# Altium PCB Carte_Nucleo.PcbDoc
Units mm, origin at the board's own origin, x right, y up, seen from the top; angles counter-clockwise.
Board outline 175 x 85 mm, 4 copper layers (Top Layer, +3V3, GND, Bottom Layer), stack 0.603 mm thick; 66 components, 70 nets, 338 pads, 91 vias.
Unrouted connection lines stored in the file: 84.
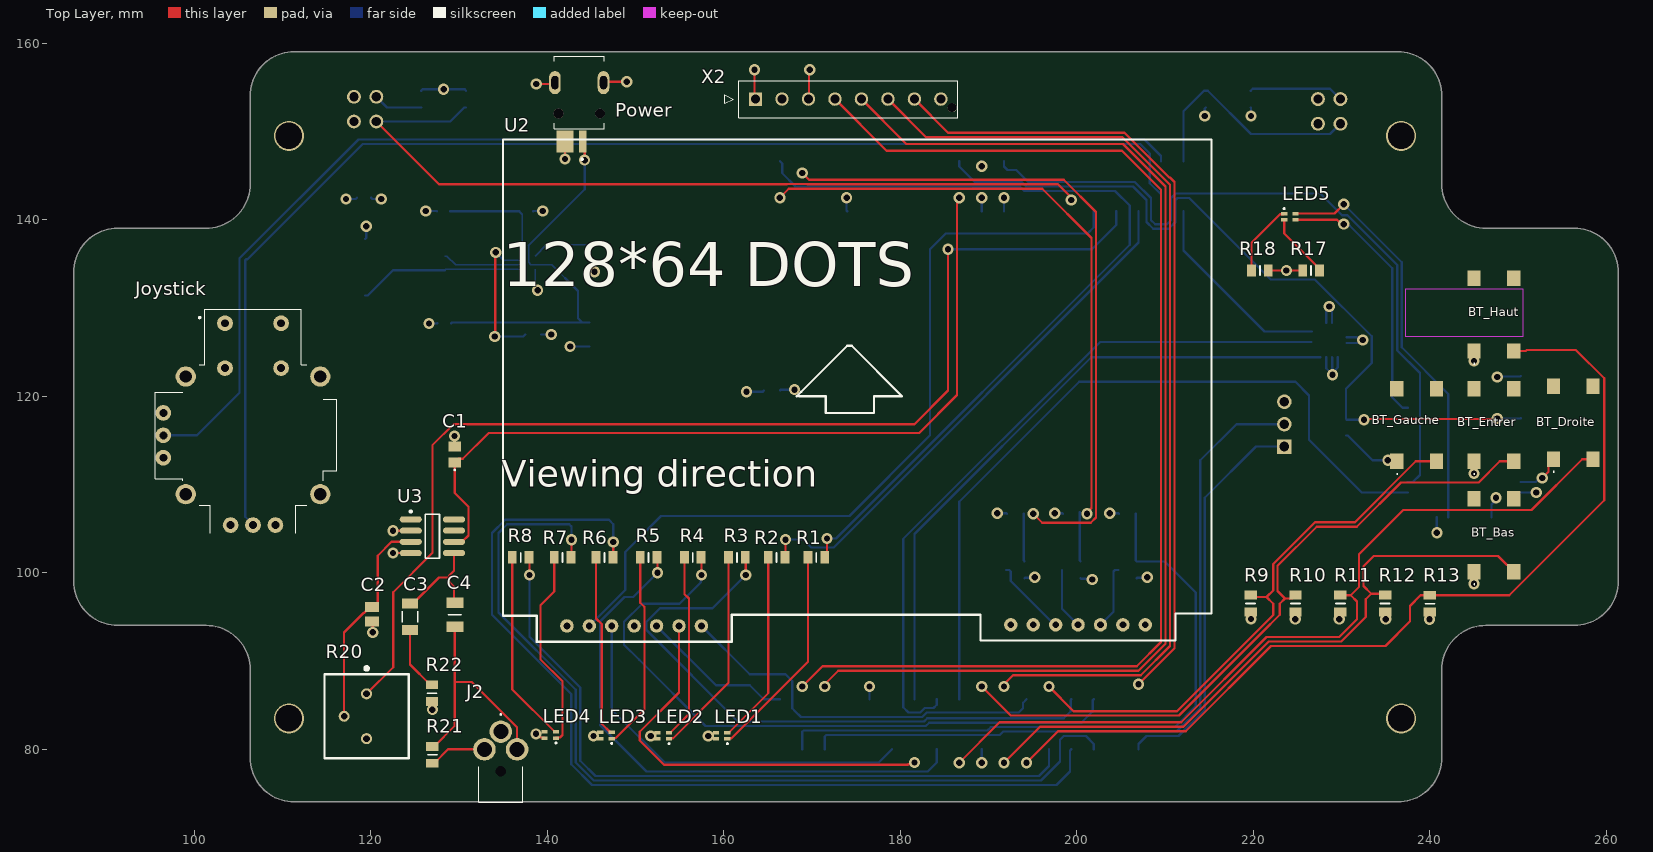
[diagram p0: Top Layer view]
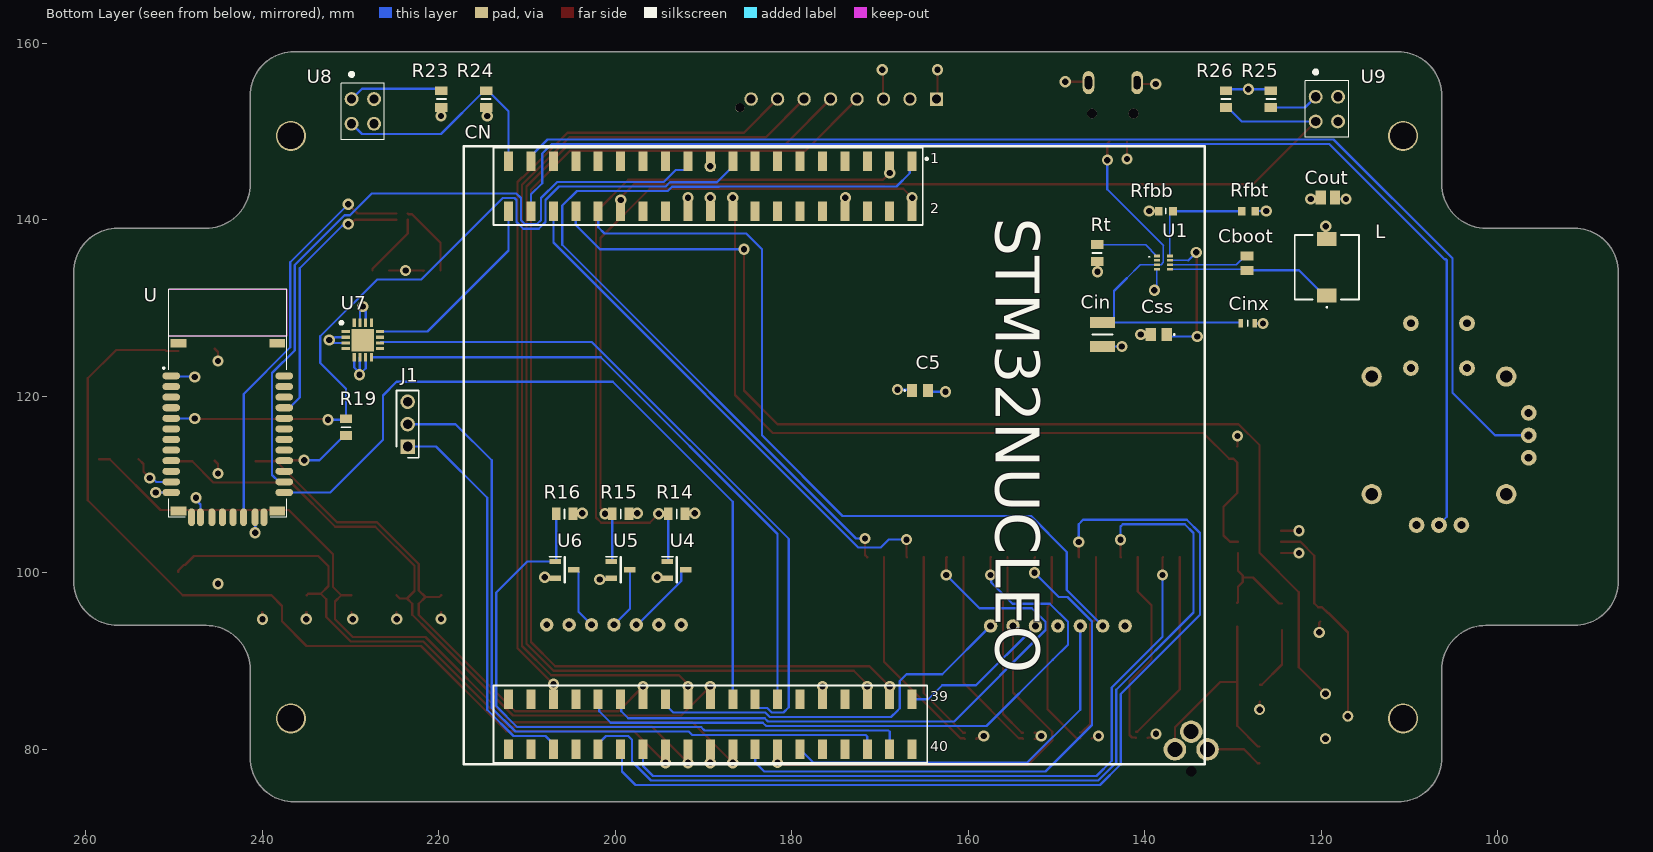
[diagram p1: Bottom Layer view, seen from below]
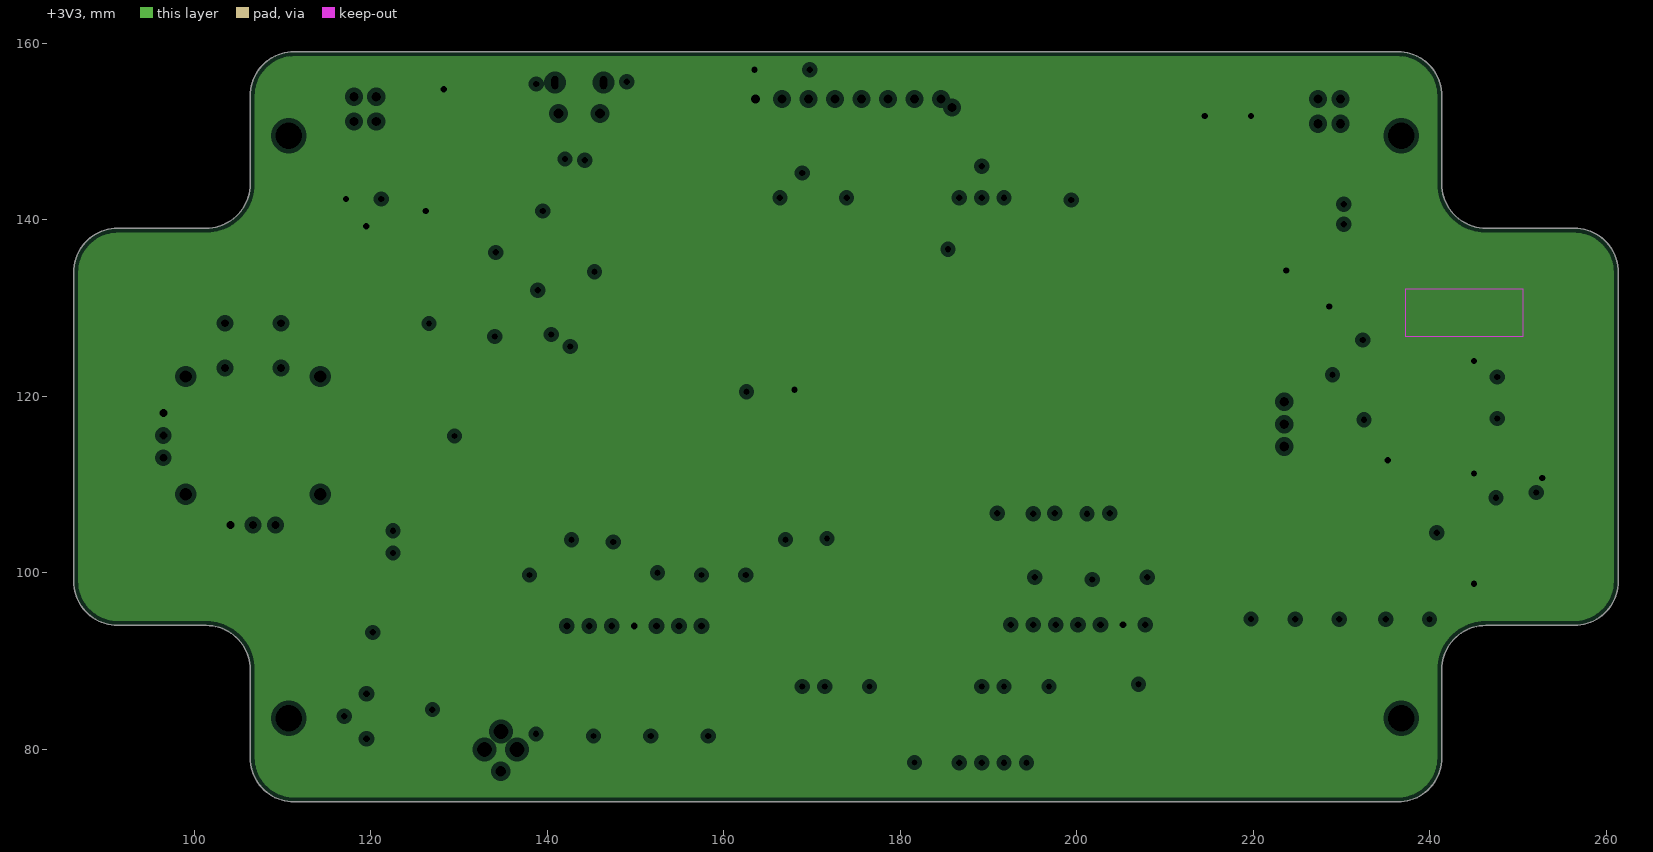
[diagram p2: +3V3, clearances drawn from the general rule]
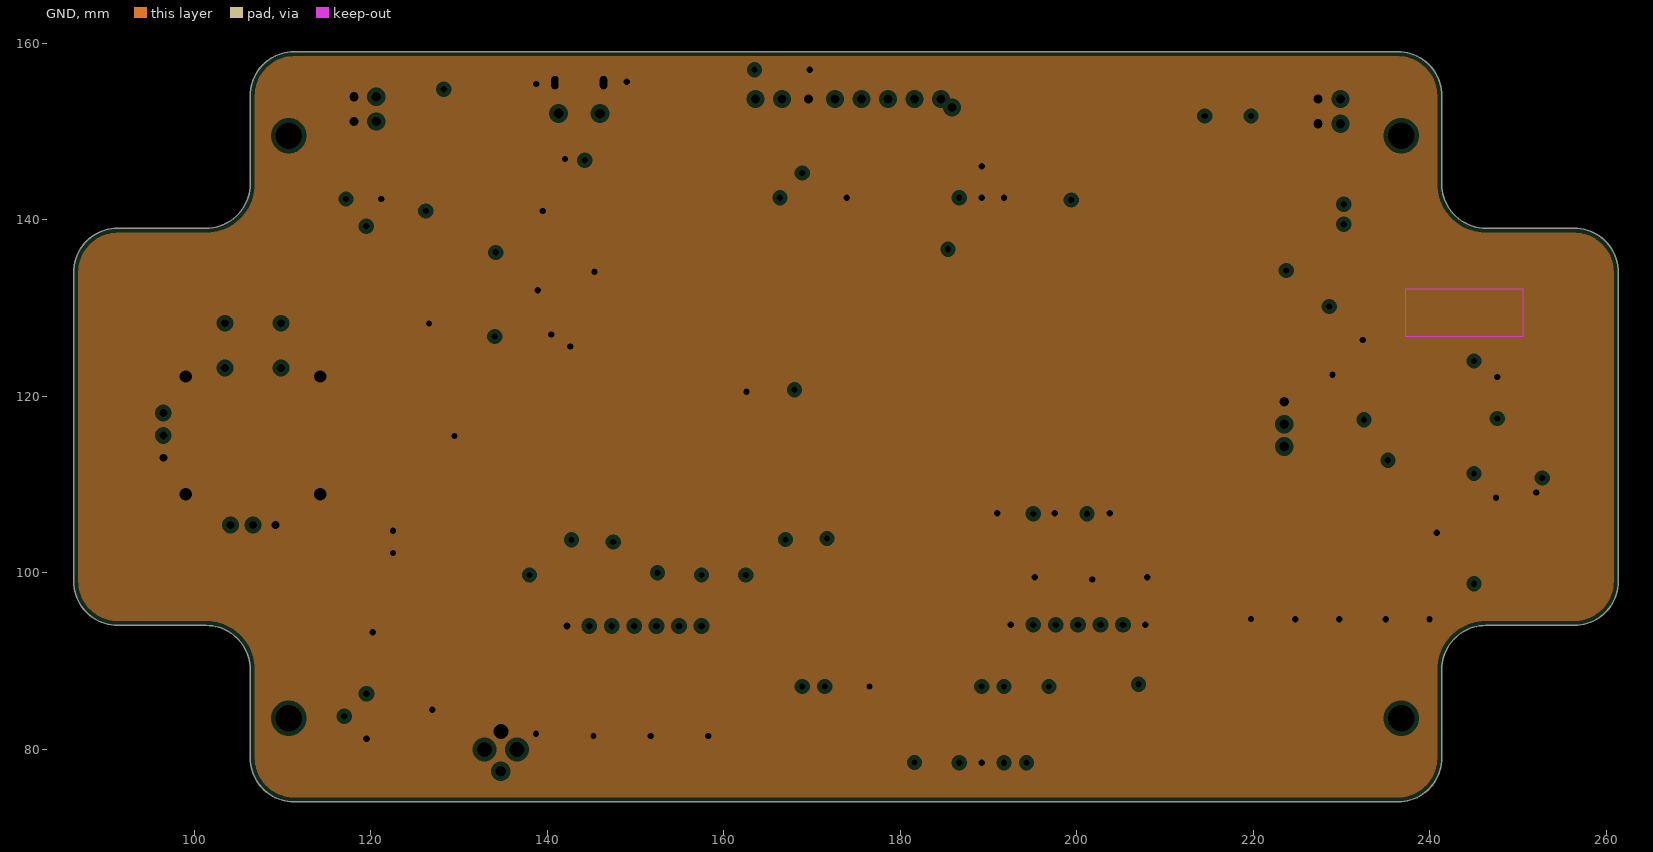
[diagram p3: GND, clearances drawn from the general rule]

## Layer stack, top to bottom
Top Solder: solder mask 0.0102, Solder Resist, Dk 3.5
Top Layer: signal copper 0.0356
Dielectric 2: prepreg 0.0711, PP-006, Dk 4.1
+3V3: plane copper 0.035, net +3V3
Dielectric 1: dielectric 0.32, FR-4, Dk 4.8
GND: plane copper 0.035, net GND
Dielectric 3: prepreg 0.0711, PP-006, Dk 4.1
Bottom Layer: signal copper 0.0356
Bottom Solder: solder mask 0.0102, Solder Resist, Dk 3.5

## Board outline
106.36,79.041 106.36,89.041 ccw(c101.36,89.041) 101.36,94.041 91.36,94.041 cw(c91.36,99.041) 86.36,99.041 86.36,134.041 cw(c91.36,134.041) 91.36,139.041 101.36,139.041 ccw(c101.36,144.041) 106.36,144.041 106.36,154.041 cw(c111.36,154.041) 111.36,159.041 236.36,159.041 cw(c236.36,154.041) 241.36,154.041 241.36,144.041 ccw(c246.36,144.041) 246.36,139.041 256.36,139.041 cw(c256.36,134.041) 261.36,134.041 261.36,99.041 cw(c256.36,99.041) 256.36,94.041 246.36,94.041 ccw(c246.36,89.041) 241.36,89.041 241.36,79.041 cw(c236.36,79.041) 236.36,74.041 111.36,74.041 cw(c111.36,79.041)

## Design rules (kind name [scope] priority, off if disabled: settings)
Clearance [All] p1: gap=0.254 ignorepadtopadclearanceinfootprint=TRUE except(0: Arc-Hole Track-Hole SMDPad-Hole THPad-Hole Via-Hole Fill-Hole Poly-Hole Region-Hole Text-Hole)
ComponentClearance [All] p1: gap=0.254 collisioncheckmode=3 verticalgap=0.254 showdistances=FALSE donotcheckwithout3dbody=TRUE
HoleSize [All] p1: absolutevalues=TRUE maxlimit=3 minlimit=0.025 maxpercent=80.000 minpercent=20.000
PlaneClearance [All] p1: clearance=0.508
PlaneConnect [All] p1: pad.planeconnectstyle=Relief pad.reliefexpansion=0.508 pad.reliefentries=4 pad.reliefconductorwidth=0.254 pad.reliefairgap=0.254 via.planeconnectstyle=Direct via.reliefexpansion=0.508 via.reliefentries=4 via.reliefconductorwidth=0.254 via.reliefairgap=0.254
PolygonConnect [All] p1: connectstyle=Relief reliefconductorwidth=0.254 reliefentries=4 polygonreliefangle="90 Angle" airgapwidth=0.254
RoomDefinition Alimentation [InComponentClass('Alimentation')] p1: confinementstyle=ConfineIn formatcopy=TRUE lockcomponents=FALSE outline 262.509,75.565 340.106,75.565 340.106,94.361 262.509,94.361
RoomDefinition Connecteur_Nucleo [InComponentClass('Connecteur_Nucleo')] p2: confinementstyle=ConfineIn formatcopy=TRUE lockcomponents=FALSE outline 262.509,95.631 337.439,95.631 337.439,182.753 262.509,182.753
RoomDefinition IO_Carte_Nucleo [InComponentClass('IO_Carte_Nucleo')] p3: confinementstyle=ConfineIn formatcopy=TRUE lockcomponents=FALSE outline 262.509,184.023 534.924,184.023 534.924,267.462 262.509,267.462
RoomDefinition IO_Carte_Nucleo2 [InComponentClass('IO_Carte_Nucleo2')] p4: confinementstyle=ConfineIn formatcopy=TRUE lockcomponents=FALSE outline 262.509,268.605 430.657,268.605 430.657,299.339 262.509,299.339
RoutingVias [All] p1: holewidth=0.711 width=1.27 viastyle="Through Hole" minholewidth=0.711 minwidth=1.27 maxholewidth=0.711 maxwidth=1.27
SolderMaskExpansion [All] p1: expansion=0.102 istentingtop=FALSE
Width [All] p1: maxlimit=0.254 minlimit=0.15 preferedwidth=0.254
26 further rules are at their usual default settings.

## Classes and differential pairs
component class IO_Carte_Nucleo: BT_Bas BT_Droite BT_Entrer BT_Gauche BT_Haut Joystick LED1 LED2 LED3 LED4 R1 R2 R3 R4 R5 R6 R7 R8 R9 R10 R11 R12 R13 R14 R15 R16 U2 U4 U5 U6
component class IO_Carte_Nucleo2: C1 C2 C3 C4 C5 J2 LED5 R17 R18 R19 R20 R21 R22 R23 R24 R25 R26 U U3 U7 U8 U9 X2
component class Connecteur_Nucleo: CN J1
component class Alimentation: Cboot Cin Cinx Cout Css L Power Rfbb Rfbt Rt U1

## Components (designator, comment, footprint, x,y, rotation, side; value= is the part's Value field where it differs from the comment)
BT_Bas "TS05-66-50-BK-260-SMT-67" TS056650BK260SMT67 247.25,104.25 r90 top locked
BT_Droite "TS05-66-50-BK-260-SMT-67" TS056650BK260SMT67 256.25,117 r90 top locked
BT_Entrer "TS05-66-50-BK-260-SMT-67" TS056650BK260SMT67 247.25,116.75 r90 top locked
BT_Gauche "TS05-66-50-BK-260-SMT-67" TS056650BK260SMT67 238.5,116.75 r90 top locked
BT_Haut "TS05-66-50-BK-260-SMT-67" TS056650BK260SMT67 247.25,129.25 r90 top locked
C1 "C0805X474K3RACAUTO7210" C0805 129.54,113.4 r90 top
C2 "C0805X105K5RACAUTO" CAPC2012X145N 120.142,95.298 r270 top
C3 "12065C503JAT2A" CAPC3216X94N 124.46,95.021 r270 top
C4 "GRM31CR60J227ME11L" CAPC3216X190N 129.54,95.25 r270 top
C5 "C0805X474K3RACAUTO7210" C0805 165.47,120.65 r180 bottom
Cboot "C0805C104K5RAC7411" CAPC2012X88N 128.425,135.075 r270 bottom
Cin "UMR325AC7106MM-P" CAPC3225X280N 144.78,127 r270 bottom
Cinx "CGA3E2X7R1H104K080AA" CAPC1608X90N 128.35,128.275 r180 bottom
CN "" "Nucleo-conn-SMD - sans 3D" 189.23,113.316 r270 bottom locked
Cout "GRM21BR60G107ME15L" CAPC2012X145N 119.265,142.5 r180 bottom
Css "C0805C333J2RACTU" C0805 138.43,127 r0 bottom
J1 "XJ8B-0311" HDRV3W64P0X254_1X3_760X250X580P 223.52,114.3 r90 bottom
J2 "MJ1-2503A" MJ12503A 134.75,82 r90 top
Joystick "COM-09032" XDCR_COM-09032 106.553,115.824 r0 top locked
L "74477710" 74477710 119.38,134.62 r0 bottom
LED1 "HSMF-C165" HSMF-C163 159.766,81.534 r180 top
LED2 "HSMF-C165" HSMF-C163 153.162,81.534 r180 top
LED3 "HSMF-C165" HSMF-C163 146.67,81.565 r180 top
LED4 "HSMF-C165" HSMF-C163 140.35,81.63 r180 top
LED5 "HSMF-C165" HSMF-C163 224.15,140.35 r0 top
Power "PJ-072C-SMT-TR" PJ-072C-SMT-TR 143.51,154.94 r270 top
R1 "CR0805-FX-1200ELF" RESC2012X60N 170.5,101.75 r180 top
R2 "CR0805-FX-1200ELF" RESC2012X60N 166,101.75 r180 top
R3 "CR0805-FX-1200ELF" RESC2012X60N 161.5,101.75 r180 top
R4 "CR0805-FX-1200ELF" RESC2012X60N 156.5,101.75 r180 top
R5 "CR0805-FX-1200ELF" RESC2012X60N 151.5,101.75 r180 top
R6 "CR0805-FX-1200ELF" RESC2012X60N 146.5,101.75 r180 top
R7 "CR0805-FX-1200ELF" RESC2012X60N 141.75,101.75 r180 top
R8 "CR0805-FX-1200ELF" RESC2012X60N 137,101.75 r180 top
R9 "CR0805-JW-103ELF" RESC2012X60N 219.71,96.52 r270 top
R10 "CR0805-JW-103ELF" RESC2012X60N 224.79,96.52 r270 top
R11 "CR0805-JW-103ELF" RESC2012X60N 229.87,96.52 r270 top
R12 "CR0805-JW-103ELF" RESC2012X60N 234.95,96.52 r270 top
R13 "CR0805-JW-103ELF" RESC2012X60N 240,96.5 r270 top
R14 "CR0805-JW-103ELF" RESC2012X60N 193.04,106.68 r180 bottom
R15 "CR0805-JW-103ELF" RESC2012X60N 199.39,106.68 r180 bottom
R16 "CR0805-JW-103ELF" RESC2012X60N 205.74,106.68 r180 bottom
R17 "CR0805-FX-1200ELF" RESC2012X60N 226.55,134.25 r180 top
R18 "CR0805-FX-1200ELF" RESC2012X60N 220.75,134.25 r0 top (schematic designator R18$)
R19 "CR0805-JW-103ELF" RESC2012X60N 230.5,116.5 r90 bottom
R20 "3386P-1-103LF" 3386P_1 124.32,78.985 r90 top
R21 "CRCW08050000Z0EAC" RESC2012X60N 127,79.375 r270 top
R22 "CHP0805AFX-10R0ELF" RESC2012X60N 126.96,86.36 r270 top
R23 "CR0805-FX-1000ELF" RESC2012X60N 219.71,153.67 r90 bottom
R24 "CR0805-JW-103ELF" RESC2012X60N 214.63,153.67 r90 bottom
R25 "CR0805-FX-1000ELF" RESC2012X60N 125.73,153.67 r270 bottom
R26 "CR0805-JW-103ELF" RESC2012X60N 130.81,153.67 r270 bottom
Rfbb "CRCW060310K0FKEAC" RESC1608X55N 137.63,140.97 r0 bottom
Rfbt "CRCW060330K9FKEA" RESC1608X50N 128.27,140.97 r0 bottom
Rt "CR0805-FX-6192ELF" RESC2012X60N 145.4,136.225 r270 bottom
U "RN42-I/RM" XCVR_RN42-I/RM 243.9,115.7 r180 bottom locked
U1 "TPS62932DRLR" TPS62932DRLR 137.9,135.14 r180 bottom
U2 "NHD-C12864A1Z-FS(RGB)-FBW-HT1" NHD-C12864A1Z-FS(RGB)-FBW-HT1 145.034,94.234 r0 top locked
U3 "LM386M-1/NOPB" TI-D8_M 127,104.14 r0 top
U4 "IRLML6344TRPBF" SOT95P237X112-3N 193.04,100.33 r180 bottom
U5 "IRLML6344TRPBF" SOT95P237X112-3N 199.39,100.33 r180 bottom
U6 "IRLML6344TRPBF" SOT95P237X112-3N 205.74,100.33 r180 bottom
U7 "ADXL335BCPZ-RL7" QFN65P400X400X150-17N-D 228.6,126.365 r180 bottom
U8 "ITR-20001_T" ITR20001T 229.87,153.67 r270 bottom
U9 "ITR-20001_T" ITR20001T 120.65,153.93 r270 bottom
X2 "216571-2008" 216571-YY08 163.61,153.67 r180 top locked

## Footprints (in the part's own frame and the unit in brackets; to place one, negate y for a bottom-side part, rotate by r counter-clockwise, add the part's x,y. Pads: shape width x height; smd on the part's side, far side on the other; paste and mask are expansions set on the pad)
3386P_1 [mm]
  round 1.25 hole 0.75: 1(7.305,4.78) 2(4.765,7.32) 3(2.225,4.78)
  silkscreen extent 0,0 10.36,9.53
216571-YY08 [mm]
  rect 1.52x1.52 hole 1.02: 1(0,0)
  round 1.52 hole 1.02: 2(-3,0) 3(-6,0) 4(-9,0) 5(-12,0) 6(-15,0) 7(-18,0) 8(-21,0)
  round 1.02 hole 1.02 unplated: 9(-22.28,0.98)
  silkscreen extent -22.93,-2.09 3.5,2.09, body extent -22.93,-2.09 3.25,2.09, height 10.01
74477710 [mm]
  rect 2.2x1.6 smd: 1(0,3.2) 2(0,-3.2)
  silkscreen extent -3.65,-3.65 3.65,4.6, body extent -3.65,-3.84 3.65,3.84, height 4.6
C0805 [mm]
  rect 1.15x1.45 smd: 1(-0.9,0) 2(0.9,0)
  silkscreen extent -1.8,-0.05 -1.7,0.05, body extent -1.15,-0.78 1.15,0.77, height 0.98
CAPC1608X90N [mm]
  rect 0.54x0.94 smd: 1(-0.8,0) 2(0.8,0)
  silkscreen extent 0,-0.3 0,0.3, body extent -0.8,-0.4 0.8,0.4, height 0.9
CAPC2012X88N [mm]
  rect 1.02x1.47 smd: 1(-0.8,0) 2(0.8,0)
  body extent -1,-0.63 1,0.63, height 0.88
CAPC2012X145N [mm]
  rect 1.14x1.57 smd: 1(-0.81,0) 2(0.81,0)
  body extent -1.17,-0.78 1.18,0.77, height 1.45
CAPC3216X94N [mil]
  rect 44x71 smd: 1(-59,0) 2(59,0)
  silkscreen extent -24,-35 24,35
CAPC3216X190N [mm]
  rect 1.22x1.92 smd: 1(-1.35,0) 2(1.35,0)
  silkscreen extent 0,-0.7 0,0.7, body extent -1.6,-0.8 1.6,0.8, height 1.9
CAPC3225X280N [mm]
  rect 1.22x2.82 smd: 1(-1.35,0) 2(1.35,0)
  silkscreen extent 0,-1.15 0,1.15, body extent -1.6,-1.25 1.6,1.25, height 2.8
HDRV3W64P0X254_1X3_760X250X580P [mm]
  rect 1.65x1.65 hole 1.1: 1(0,0)
  round 1.65 hole 1.1: 2(2.54,0) 3(5.08,0)
  silkscreen extent -1.26,-1.25 6.34,1.25, body extent -1.26,-1.25 6.34,1.25, height 5.8
HSMF-C163 [mm]
  rect 0.7x0.4 smd: 1(-0.65,0.35) 2(-0.65,-0.35) 3(0.65,0.35) 4(0.65,-0.35)
  silkscreen extent -0.72,0.83 -0.58,0.97
ITR20001T [mm]
  round 1.575 hole 1.05: 1(0,0) 2(0,2.54) 3(2.8,2.54) 4(2.8,0)
  silkscreen extent -3,-1.18 4.6,3.72, body extent -1.8,-1.18 4.6,3.72, height 6.9
MJ12503A [mm]
  round 2.55 hole 1.7: 1(0,0) 2(-2,-1.85) 3(-2,1.85)
  round 0.6 hole 1.2 unplated: MH1(-4.5,0)
  silkscreen extent -8,-2.5 2,2.5, body extent -11,-2.6 0.75,2.6, height 5.1
NHD-C12864A1Z-FS(RGB)-FBW-HT1 [mil]
  round 60 hole 30: 1(-110,-10) 2(-10,-10) 3(90,-10) 4(190,-10) 5(290,-10) 6(390,-10) 7(490,-10) 8(1870,-5) 9(1970,-5) 10(2070,-5) 11(2170,-5) 12(2270,-5) 13(2370,-5) 14(2470,-5)
  silkscreen extent -395,-80 2765,2160
"Nucleo-conn-SMD - sans 3D" [mm] "Interface Nucleo morpho connectors"
  rect 2.22x1.02 smd: 1(-33.306,22.86) 2(-27.654,22.86) 3(-33.306,20.32) 4(-27.654,20.32) 5(-33.306,17.78) 6(-27.654,17.78) 7(-33.306,15.24) 8(-27.654,15.24) 9(-33.306,12.7) 10(-27.654,12.7) 11(-33.306,10.16) 12(-27.654,10.16) 13(-33.306,7.62) 14(-27.654,7.62) 15(-33.306,5.08) 16(-27.654,5.08) 17(-33.306,2.54) 18(-27.654,2.54) 19(-33.306,0) 20(-27.654,0) 21(-33.306,-2.54) 22(-27.654,-2.54) 23(-33.306,-5.08) 24(-27.654,-5.08) 25(-33.306,-7.62) 26(-27.654,-7.62) 27(-33.306,-10.16) 28(-27.654,-10.16) 29(-33.306,-12.7) 30(-27.654,-12.7) 31(-33.306,-15.24) 32(-27.654,-15.24) 33(-33.306,-17.78) 34(-27.654,-17.78) 35(-33.306,-20.32) 36(-27.654,-20.32) 37(-33.306,-22.86) 38(-27.654,-22.86) 39(27.654,22.86) 39(27.654,22.86) 40(33.306,22.86) 41(27.654,20.32) 42(33.306,20.32) 43(27.654,17.78) 44(33.306,17.78) 45(27.654,15.24) 46(33.306,15.24) 47(27.654,12.7) 48(33.306,12.7) 49(27.654,10.16) 50(33.306,10.16) 51(27.654,7.62) 52(33.306,7.62) 53(27.654,5.08) 54(33.306,5.08) 55(27.654,2.54) 56(33.306,2.54) 57(27.654,0) 58(33.306,0) 59(27.654,-2.54) 60(33.306,-2.54) 61(27.654,-5.08) 62(33.306,-5.08) 63(27.654,-7.62) 64(33.306,-7.62) 65(27.654,-10.16) 66(33.306,-10.16) 67(27.654,-12.7) 68(33.306,-12.7) 69(27.654,-15.24) 70(33.306,-15.24) 71(27.654,-17.78) 72(33.306,-17.78) 73(27.654,-20.32) 74(33.306,-20.32) 75(27.654,-22.86) 76(33.306,-22.86)
  silkscreen extent -35,-27.94 35,56.03, body extent -34.02,-24.16 33.97,24.1, height 7.37
PJ-072C-SMT-TR [mm]
  rect 2.45x0.9 smd: 1(6.083,0.527)
  rect 2.45x1.9 smd: 2(6.083,-1.473)
  oval 2.616x1.308 hole 0.8 slot 1.5 at 0 deg: 3(-0.592,2.877) 4(-0.592,-2.623)
  round 1.1 hole 1.1 unplated: ""(2.908,2.477) ""(2.908,-2.223)
  silkscreen extent -3.59,-2.72 8.18,2.98
QFN65P400X400X150-17N-D [mm]
  rect 0.95x0.35 smd: 1(-1.95,0.975) 2(-1.95,0.325) 3(-1.95,-0.325) 4(-1.95,-0.975) 9(1.95,-0.975) 10(1.95,-0.325) 11(1.95,0.325) 12(1.95,0.975)
  rect 0.35x0.95 smd: 5(-0.975,-1.95) 6(-0.325,-1.95) 7(0.325,-1.95) 8(0.975,-1.95) 13(0.975,1.95) 14(0.325,1.95) 15(-0.325,1.95) 16(-0.975,1.95)
  rect 2.55x2.55 smd: 17(0,0)
  silkscreen extent -2.59,1.79 -2.26,2.11, body extent -2.05,-2.05 2.05,2.05, height 1.5
RESC1608X50N [mm]
  rect 0.85x1 smd: 1(-0.75,0) 2(0.75,0)
  body extent -0.79,-0.43 0.79,0.43, height 0.5
RESC1608X55N [mm]
  rect 0.9x0.95 smd: 1(-0.8,0) 2(0.8,0)
  silkscreen extent 0,-0.3 0,0.3, body extent -0.8,-0.4 0.8,0.4, height 0.55
RESC2012X60N [mm]
  rect 1x1.4 smd: 1(-0.95,0) 2(0.95,0)
  silkscreen extent 0,-0.53 0,0.53, body extent -1,-0.63 1,0.63, height 0.5
SOT95P237X112-3N [mm]
  rect 1.3x0.6 smd: 1(-1.05,0.95) 2(-1.05,-0.95) 3(1.05,0)
  silkscreen extent -1.7,-1.46 0.05,1.5, body extent -1.18,-1.46 1.18,1.46, height 1.12
TI-D8_M [mm] "SOIC, 8-Leads, Body 5x4mm, Pitch 1.27mm, IPC Low Density"
  oval 2.5x0.7 smd: 1(-2.45,1.905) 2(-2.45,0.635) 3(-2.45,-0.635) 4(-2.45,-1.905) 5(2.45,-1.905) 6(2.45,-0.635) 7(2.45,0.635) 8(2.45,1.905)
  silkscreen extent -2.57,-2.5 0.8,2.93, body extent -2,-2.5 2,2.5, height 1.75
TPS62932DRLR [mm]
  rect 0.67x0.3 smd: 1(-0.74,0.75) 2(-0.74,0.25) 3(-0.74,-0.25) 4(-0.74,-0.75) 5(0.74,-0.75) 6(0.74,-0.25) 7(0.74,0.25) 8(0.74,0.75)
  silkscreen extent -1.65,0.6 -1.55,0.7, body extent -0.6,-1.05 0.6,1.05, height 0.7
TS056650BK260SMT67 [mm]
  rect 1.75x1.5 smd: 1(-4.125,2.25) 2(-4.125,-2.25) 3(4.125,2.25) 4(4.125,-2.25)
  silkscreen extent -5.6,2.15 -5.5,2.25
XCVR_RN42-I/RM [mm]
  oval 2x0.8 smd: 1(-6.4,6.6) 2(-6.4,5.4) 3(-6.4,4.2) 4(-6.4,3) 5(-6.4,1.8) 6(-6.4,0.6) 7(-6.4,-0.6) 8(-6.4,-1.8) 9(-6.4,-3) 10(-6.4,-4.2) 11(-6.4,-5.4) 12(-6.4,-6.6) 13(6.4,-6.6) 14(6.4,-5.4) 15(6.4,-4.2) 16(6.4,-3) 17(6.4,-1.8) 18(6.4,-0.6) 19(6.4,0.6) 20(6.4,1.8) 21(6.4,3) 22(6.4,4.2) 23(6.4,5.4) 24(6.4,6.6)
  oval 0.8x2 smd: 28(3.1,-9.4) 29(-3.1,-9.4) 30(4.1,-9.4) 31(1.8,-9.4) 32(0.6,-9.4) 33(-0.6,-9.4) 34(-1.8,-9.4) 35(-4.1,-9.4)
  rect 1.8x1 smd: S1(-5.6,-8.7) S2(5.6,-8.7) S3(5.6,10.3) S4(-5.6,10.3)
  Keep-Out Layer region: 6.7,11.107 -6.704,11.107 -6.704,16.4 6.7,16.4
  Keep-Out Layer region: 6.7,11.117 -6.71,11.117 -6.71,16.4 6.7,16.4
  silkscreen extent -7.35,-9.4 6.7,16.4
XDCR_COM-09032 [mil]
  round 70 hole 35.43: B1A(-120,490) B1B(130,490) B2A(-120,290) B2B(130,290)
  round 70 hole 35: H1(-95,-410) H2(5,-410) H3(105,-410) V1(-395,90) V2(-395,-10) V3(-395,-110)
  round 90 hole 55: S1(-295,252.5) S2(-295,-272.5) S3(305,-272.5) S4(305,252.5)
  silkscreen extent -432,-447 379,553

## Part data
BT_Bas BT_Droite BT_Entrer BT_Gauche BT_Haut: "6 x 6 mm, 4.3 ~ 8 mm Actuator Height, 100 ~ 260 gf, Surface Mount, IP67, SPST, Tactile Switch", Supplier Part Number 1=179-TS056650260SMT67, Datasheet Link=https://www.cuidevices.com/product/resource/ts05.pdf, Height=5.2mm, Supplier 1=Mouser
C1 C2 C5: "Capacitor", Manufacturer_Name=KEMET
  C1 C5: Datasheet Link=https://content.kemet.com/datasheets/KEM_C1078_X7R_FT-CAP_AUTO_SMD.pdf, Height=1.1mm, Manufacturer_Part_Number=C0805X474K3RACAUTO7210
  C2: Datasheet Link=https://connect.kemet.com:7667/gateway/IntelliData-ComponentDocumentation/1.0/download/specsheet/C0805X105K5RACAUTO, Height=1.45mm, Manufacturer_Part_Number=C0805X105K5RACAUTO
C3: "Capacitor", Manufacturer_Name=AVX, Manufacturer_Part_Number=12065C503JAT2A
C4: "Capacitor", Manufacturer_Name="Murata Electronics", Datasheet Link=https://www.murata.com/products/productdetail?partno=GRM31CR60J227ME11%23, Height=1.9mm, Manufacturer_Part_Number=GRM31CR60J227ME11L
Cboot: "Multilayer Ceramic Capacitors MLCC - SMD/SMT 50V 0.1uF X7R 0805 10%", Manufacturer_Name=KEMET, Mouser2 Part Number=80-C0805C104K5RACLR, Datasheet Link=https://componentsearchengine.com//C0805C104K5RAC7411.pdf, Height=0.88mm, Manufacturer_Part_Number=C0805C104K5RAC7411, Mouser2 Price/Stock=https://www.mouser.com/Search/Refine.aspx?Keyword=80-C0805C104K5RACLR, Supplier 1=Mouser, Supplier Part Number 1=80-C0805C104K5RACLR
Cin: "Capacitor 1210 50V 10uF +-20%", Manufacturer_Name="TAIYO YUDEN", Supplier Part Number 1=83AH3992, Height=2.8mm, Manufacturer_Part_Number=UMR325AC7106MM-P, Supplier 1=Newark
Cinx: "Capacitor 0603 100nF", Manufacturer_Name=TDK, Mouser2 Part Number=810-CGA3E2X7R1H104K, Supplier Part Number 1=9214481, Datasheet Link=https://componentsearchengine.com//CGA3E2X7R1H104K080AA.pdf, Height=0.9mm, Manufacturer_Part_Number=CGA3E2X7R1H104K080AA, Mouser2 Price/Stock=https://www.mouser.com/Search/Refine.aspx?Keyword=810-CGA3E2X7R1H104K, Supplier 1=RSComponents
CN: library part CN1, "Headers & Wire Housings Surface Mount PCB Socket Strips, 0.100 pitch", Supplier Part Number 1=81P6392, ComponentLink1Description="New link", Supplier 1=Newark
Cout: "0805 100 uF 4 V ±20% Tolerance X5R Multilayer Ceramic Chip Capacitor", Manufacturer_Name="Murata Electronics", Supplier Part Number 1=8072633, Datasheet Link=https://datasheet.datasheetarchive.com/originals/distributors/DKDS-10/192999.pdf, Height=1.45mm, Manufacturer_Part_Number=GRM21BR60G107ME15L, Supplier 1="Future Electronics"
Css: "Multilayer Ceramic Capacitors MLCC - SMD/SMT 200V 0.033uF X7R 0805 5%", Manufacturer_Name=KEMET, Supplier Part Number 1=80-C0805C333J2RACTU, Datasheet Link=https://content.kemet.com/datasheets/KEM_C1002_X7R_SMD.pdf, Height=1.1mm, Manufacturer_Part_Number=C0805C333J2RACTU, Supplier 1=Mouser
J1: "Conn Unshrouded Header PL 3 POS 2.54mm Solder ST Top Entry Thru-Hole", Manufacturer_Name="Omron Electronics", Datasheet Link=https://www.omron.com/ecb/products/pdf/en-xj8.pdf, Height=5.8mm, Manufacturer_Part_Number=XJ8B-0311, Supplier 1="Arrow Electronics", Supplier Part Number 1=XJ8B-0311
J2: "Connector", Manufacturer_Name="CUI Inc.", Mouser2 Part Number=490-MJ1-2503A, Datasheet Link=https://componentsearchengine.com//MJ1-2503A.pdf, Height=5mm, Manufacturer_Part_Number=MJ1-2503A, Mouser2 Price/Stock=https://www.mouser.com/Search/Refine.aspx?Keyword=490-MJ1-2503A
Joystick: "Thumb Joystick", Package=None, Supplier Part Number 1=474-COM-09032, Availability=Unavailable, MP=COM-09032, Price=None, Supplier 1=Mouser
L: Supplier Part Number 1=1241886, Supplier 1=RSComponents
LED1 LED2 LED3 LED4: "Standard LEDs - SMD Grn/Red Bi-Color", Manufacturer_Name="Avago Technologies", Mouser2 Part Number=630-HSMF-C165, Supplier Part Number 1=450991P, Datasheet Link=https://componentsearchengine.com//HSMF-C165.pdf, Manufacturer_Part_Number=HSMF-C165, Mouser2 Price/Stock=https://www.mouser.com/Search/Refine.aspx?Keyword=630-HSMF-C165, Supplier 1=RSComponents
LED5: "LED Bi-Color Green/Red 570nm/636nm 4-Pin Chip 0603 T/R", Manufacturer_Name="Avago Technologies", Mouser2 Part Number=630-HSMF-C165, Supplier Part Number 1=450991P, Datasheet Link=https://componentsearchengine.com//HSMF-C165.pdf, Manufacturer_Part_Number=HSMF-C165, Mouser2 Price/Stock=https://www.mouser.com/Search/Refine.aspx?Keyword=630-HSMF-C165, Supplier 1=RSComponents
Power: "1.0 x 3.6 mm, 2.0 A, Horizontal, Surface Mount (SMT), Shielded, Dc Power Jack Connector", Supplier Part Number 1=490-PJ-072C-SMT-TR, Supplier 1=Mouser
R1 R2 R3 R4 R5 R6 R7 R8: "Res Thick Film 0805 120 Ohm 1% 1/8W ±100ppm/°C Molded SMD SMD Paper Tape on Plastic Reel", Datasheet Link=https://www.bourns.com/pdfs/chpreztr.pdf, Height=0.6mm, Supplier 1="Arrow Electronics", Supplier Part Number 1=CR0805-FX-1200ELF
R9 R10 R11 R12 R13 R14 R15 R16 R19: "BOURNS         CR0805-JW-103ELF            Surface Mount Chip Resistor, Thick Film, CR Series, 10 kohm, 125 mW,  5%, 150 V", Datasheet Link=https://componentsearchengine.com//CR0805-JW-103ELF.pdf, Height=0.6mm, Supplier 1="Arrow Electronics", Supplier Part Number 1=CR0805-JW-103ELF
R17 R18 R22 R23 R25: "Resistor", Manufacturer_Name=Bourns, Height=0.6mm
  R17 R18: Datasheet Link=https://www.bourns.com/pdfs/chpreztr.pdf, Manufacturer_Part_Number=CR0805-FX-1200ELF
  R22: Datasheet Link=https://www.mouser.co.uk/datasheet/2/54/chp-a-1858677.pdf, Manufacturer_Part_Number=CHP0805AFX-10R0ELF
  R23 R25: Datasheet Link=https://www.bourns.com/pdfs/chpreztr.pdf, Manufacturer_Part_Number=CR0805-FX-1000ELF
R20: "Resistor", Manufacturer_Name=Bourns, Mouser2 Part Number=652-3386P-1-103LF, Datasheet Link=https://componentsearchengine.com//3386P-1-103LF.pdf, Manufacturer_Part_Number=3386P-1-103LF, Mouser2 Price/Stock=https://www.mouser.com/Search/Refine.aspx?Keyword=652-3386P-1-103LF
R21: "Resistor", Manufacturer_Name=Vishay, Mouser2 Part Number=71-CRCW08050000Z0EAC, Datasheet Link=https://componentsearchengine.com//CRCW08050000Z0EAC.pdf, Height=0.6mm, Manufacturer_Part_Number=CRCW08050000Z0EAC, Mouser2 Price/Stock=https://www.mouser.com/Search/Refine.aspx?Keyword=71-CRCW08050000Z0EAC
R24 R26: "Resistor", Manufacturer_Name=Bourns, Mouser2 Part Number=652-CR0805-JW-103ELF, Datasheet Link=https://componentsearchengine.com//CR0805-JW-103ELF.pdf, Height=0.6mm, Manufacturer_Part_Number=CR0805-JW-103ELF, Mouser2 Price/Stock=https://www.mouser.com/Search/Refine.aspx?Keyword=652-CR0805-JW-103ELF
Rfbb: "Res Thick Film 0603 10K Ohm 1% 1/10W ±100ppm/°C Molded SMD Paper T/R", Manufacturer_Name=Vishay, Mouser2 Part Number=71-CRCW060310K0FKEAC, Datasheet Link=https://componentsearchengine.com//CRCW060310K0FKEAC.pdf, Height=0.55mm, Manufacturer_Part_Number=CRCW060310K0FKEAC, Mouser2 Price/Stock=https://www.mouser.com/Search/Refine.aspx?Keyword=71-CRCW060310K0FKEAC, Supplier 1="Arrow Electronics", Supplier Part Number 1=CRCW060310K0FKEAC
Rfbt: "Res Thick Film 0603 30.9K Ohm 1% 1/10W ±100ppm/°C Molded SMD SMD Paper T/R", Manufacturer_Name=Vishay, Datasheet Link=http://www.vishay.com/docs/20035/dcrcwe3.pdf, Height=0.5mm, Manufacturer_Part_Number=CRCW060330K9FKEA, Supplier 1="Arrow Electronics", Supplier Part Number 1=CRCW060330K9FKEA
Rt: "Resistor 0805 61.9kOhm", Manufacturer_Name=Bourns, Datasheet Link=https://www.bourns.com/pdfs/chpreztr.pdf, Height=0.6mm, Manufacturer_Part_Number=CR0805-FX-6192ELF, Supplier 1=Avnet, Supplier Part Number 1=CR0805-FX-6192ELF
U: "Bluetooth Bluetooth v2.1 +EDR, Class 2 Transceiver Module 2.4GHz Integrated, Trace Surface Mount", Package="SMD-35 Roving Networks", Supplier Part Number 1=7652879, Availability=Unavailable, MF=Microchip, MP=RN42-I/RM, Price=None, SnapEDA_Link=https://www.snapeda.com/parts/RN42-I/RM/Microchip/view-part/625546/?ref=snap, Supplier 1=RSComponents
U1: "3.8-V to 30-V input, 2-A, 200-kHz to 2.2-MHz, low-IQ synchronous buck converter in SOT-583 package", Manufacturer_Name="Texas Instruments", Supplier Part Number 1=595-TPS62932DRLR, Datasheet Link=https://www.ti.com/lit/gpn/tps62932, Height=0.6mm, Manufacturer_Part_Number=TPS62932DRLR, Supplier 1=Mouser
U2: "LCD COG GRAPH 128X64 RGB BKLT", Supplier Part Number 1=NHD-C12864A1Z-FS(RGB)-FBW-HT1-ND, Supplier 1=Digi-Key
U3: library part CMP-0994-00001-1, "Low Voltage Audio Power Amplifier, 0 to 70 degC, 8-pin SOIC (D8), Green (RoHS & no Sb/Br)", Manufacturer="Texas Instruments", Code_JEDEC=MS-012, ComponentLink1Description="Manufacturer URL", ComponentLink1URL=http://www.ti.com/, ComponentLink2Description=Datasheet, ComponentLink2URL=http://www.ti.com/general/docs/lit/getliterature.tsp?genericPartNumber=LM386&fileType=pdf, ComponentLink3Description="Package Specification", ComponentLink3URL=http://www.ti.com/litv/pdf/msoi002j, DatasheetVersion=SNAS545A, Eco-Plan="Green (RoHS & no Sb/Br)", Input Type=Analog, Max. Number of Speaker Outputs=1, Mounting Technology="Surface Mount", PackageDescription="8-Pin Plastic Small Outline, Body 4.9 x 3.9 mm, Pitch 1.27 mm", PackageReference=D8, PackageVersion="4040047-3/M, 06/2011", PartNumber=LM386M-1/NOPB, SubFamily="Mid/High-Power Amplifier"
U4 U5 U6: "MOSFET (N-Channel)", Manufacturer_Name=Infineon, Mouser2 Part Number=942-IRLML6344TRPBF, Datasheet Link=https://componentsearchengine.com//IRLML6344TRPBF.pdf, Height=1.12mm, Manufacturer_Part_Number=IRLML6344TRPBF, Mouser2 Price/Stock=https://www.mouser.com/Search/Refine.aspx?Keyword=942-IRLML6344TRPBF
U7: "Integrated Circuit", Manufacturer_Name="Analog Devices", Mouser2 Part Number=584-ADXL335BCPZ-R7, Datasheet Link=https://componentsearchengine.com//ADXL335BCPZ-RL7.pdf, Height=1.5mm, Manufacturer_Part_Number=ADXL335BCPZ-RL7, Mouser2 Price/Stock=https://www.mouser.com/Search/Refine.aspx?Keyword=584-ADXL335BCPZ-R7
U8 U9: "Undefined or Miscellaneous", Manufacturer_Name=Everlight, Manufacturer_Part_Number=ITR-20001/T, Height=6.8mm
X2: "Connector", Manufacturer_Name=Molex, Datasheet Link=https://www.molex.com/pdm_docs/sd/2165711002_sd.pdf, Height=9.91mm, Manufacturer_Part_Number=216571-2008

## Free pads (board coordinates)
  round 3.4 hole 3: 19(110.75,83.5) 19(110.75,149.5) 19(236.75,83.5) 19(236.75,149.5)

## Via types
v1: diameter 1.27, hole 0.711, Top Layer to Bottom Layer, 91 vias

## Nets (pads, with @x,y where several pads share a name; then routed paths per layer and width w, separated by ;. In a path a pad name is that pad's centre, name@x,y a point inside that pad or via, vN(x,y) a via of type N, cw(c..) or ccw(c..) an arc to the next point about the centre after c; other vN are vias at no path point)
+2V8: X2.2
+3V3: BT_Bas.1 BT_Droite.1 BT_Entrer.1 BT_Gauche.1 BT_Haut.1 C5.1 Cout.2 Joystick.H1 Joystick.V1 L.2 R17.2 R18.2 R19.1 R23.1 R24.1 R25.1 R26.1 Rfbt.1 U2.4 U2.13 U7.14 U7.15 U.11 X2.1 | length 39.5
  Top Layer w0.254: Joystick.V1@96.45,118.18 Joystick.V1 ; Joystick.H1 Joystick.H1@104.195,105.355 ; U2.4 U2.4@149.938,93.902 ; v1(163.5,157) 163.5,153.78 X2.1 ; U2.13 U2.13@205.241,94.098 ; R18.2@221.75,134.2 R18.2 v1(223.75,134.25) R17.2 ; v1(235.25,112.75) 236.475,112.75 BT_Gauche.1@236.51,112.715 ; v1(245,111.25) 245,112.315 BT_Entrer.1@245.4,112.715 ; v1(245,124) 245,125.015 BT_Haut.1@245.4,125.415 ; v1(252.73,110.744) 253.448,111.462 253.448,112.323 BT_Droite.1
  Bottom Layer w0.254: v1(117.205,142.36) 118.315,142.36 Cout.2 ; L.2 119.5,137.94 v1(119.5,139.25) ; R25.1 125.885,154.775 v1(128.275,154.775) 130.655,154.775 R26.1 ; v1(126.25,141) 127.49,141 Rfbt.1 ; C5.1 166.47,120.75 v1(168.016,120.75) ; v1(214.5,151.75) 214.5,152.59 R24.1 ; R23.1 219.75,152.68 v1(219.75,151.75) ; U7.14 228.275,129.575 ; v1(228.6,130.175) 228.6,129.9 228.925,129.575 U7.15 ; R19.1 230.7,115.55 233.5,112.75 v1(235.25,112.75) ; U.11 252.011,110.3 252.455,110.744 v1(252.73,110.744)
  other v1: 245,98.75
+5V: C1.1 CN.18 U3.6 | length 93.4
  Top Layer w0.254: U3.6 130.35,103.505 131.081,104.236 131.081,107.492 129.54,109.033 C1.1 129.962,112.922 130.448,112.922 133.35,115.824 182.118,115.824 186.436,120.142 186.436,141.837 186.496,141.897 186.496,142.3 v1(186.69,142.494)
+24: Cin.1 Cinx.1 Power.1 U1.3 | length 42.8
  Top Layer w0.254: Power.1 144.25,148.644 v1(144.25,146.75)
  Bottom Layer w0.15: 137.9,137.112 137.9,135.18 138.169,134.911 138.619,134.911 U1.3 140.535,134.89
  Bottom Layer w0.2: 137.9,137.112 144.25,143.462 ; 140.535,134.89 142.025,133.4
  Bottom Layer w0.254: Cinx.1 129.225,128.35 Cin.1@143.98,128.35 ; 142.025,133.4 143.497,131.928 143.497,128.833 Cin.1@143.98,128.35 ; 144.25,143.462 v1(144.25,146.75) ; Cin.1@144.78,128.35 Cin.1@143.98,128.35
ACC_X: CN.38 U7.12 | length 22.8
  Bottom Layer w0.254: CN.38 212.09,136.525 221.275,127.34 U7.12
ACC_Y: CN.53 U7.10 | length 79.6
  Bottom Layer w0.254: CN.53 184.15,85.062 183.767,84.679 182.786,84.679 182.278,84.171 180.942,84.171 180.34,84.773 180.34,103.842 202.632,126.134 U7.10@226.568,126.134
ACC_Z: CN.51 U7.8 | length 73
  Bottom Layer w0.254: CN.51 181.61,104.394 201.631,124.415 U7.8
AUDIO_OUT: CN.32 R20.1 | length 130
  Top Layer w0.254: R20.1 122.555,89.305 122.555,97.79 127,102.235 127,114.437 129.403,116.84 181.61,116.84 185.42,120.65 v1(185.42,136.652)
  Bottom Layer w0.254: v1(185.42,136.652) 201.72,136.652 204.47,139.402 CN.32
BT_BAS: BT_Bas.2 CN.60 R12.1 | length 74.1
  Top Layer w0.254: v1(191.77,78.486) 195.834,82.55 212.09,82.55 221.766,92.226 229.976,92.226 232.75,95 232.75,97 233.375,97.625 ; R12.1 234.795,97.625 233.375,97.625 ; BT_Bas.2 249.5,100.25 248.877,100.873 248.752,100.873 247.718,101.907 233.657,101.907 232.5,100.75 232.5,98.5 233.375,97.625
BT_DROITE: BT_Droite.2 CN.56 R11.1 | length 92
  Top Layer w0.254: v1(186.69,78.486) 191.262,83.058 211.836,83.058 221.512,92.734 229.734,92.734 231.75,94.75 231.75,96.75 231.03,97.47 ; R11.1 231.03,97.47 ; BT_Droite.2 257.274,112.875 251.518,107.119 236.993,107.119 231.992,102.118 231.992,98.432 231.03,97.47
BT_ENTRER: BT_Entrer.2 CN.57 R10.1 | length 79
  Top Layer w0.254: v1(189.23,87.122) 192.532,83.82 211.578,83.82 221,93.242 223,95.242 223,96.5 223.597,97.097 ; R10.1 224.417,97.097 223.597,97.097 ; BT_Entrer.2 247.924,112.625 245.533,110.234 236.741,110.234 231.733,105.226 227.194,105.226 222.758,100.79 222.758,97.936 223.597,97.097
BT_GAUCHE: BT_Gauche.2 CN.63 R9.1 | length 62.7
  Top Layer w0.254: v1(196.85,87.122) 199.644,84.328 211.368,84.328 222.25,95.21 222.25,96.5 221.5,97.25 ; R9.1 219.93,97.25 221.5,97.25 ; BT_Gauche.2 238.414,112.625 231.523,105.734 226.984,105.734 222.25,101 222.25,98 221.5,97.25
BT_HAUT: BT_Haut.2 CN.62 R13.1 | length 104.2
  Top Layer w0.254: v1(194.31,78.486) 197.866,82.042 212.344,82.042 222.02,91.718 234.968,91.718 237.75,94.5 237.75,96.25 238.95,97.45 R13.1 248.989,97.45 259.75,108.211 259.75,122.039 256.539,125.25 251,125.25 250.875,125.125 BT_Haut.2
BT_RES: CN.17 R19.2 U.5 | length 91.6
  Top Layer w0.254: v1(232.537,117.348) 232.6,117.411 247.587,117.411 v1(247.65,117.475)
  Bottom Layer w0.254: CN.17 186.69,146.022 188.47,144.242 193.813,144.242 194.291,143.764 206.375,143.764 207.901,142.238 207.901,139.742 208.672,138.971 210.428,138.971 211.199,139.742 211.199,142.238 211.422,142.461 212.762,142.461 221.989,133.234 226.978,133.234 233.426,126.786 233.426,123.767 230.5,120.841 R19.2 230.602,117.348 v1(232.537,117.348) ; v1(247.65,117.475) 247.662,117.487 250.287,117.487 U.5
BT_RX: CN.21 U.14 | length 82.1
  Bottom Layer w0.254: CN.21 191.77,146.022 192.153,145.639 193.134,145.639 194.501,144.272 206.585,144.272 208.409,142.448 208.409,139.952 208.882,139.479 210.218,139.479 210.691,139.952 210.691,142.448 211.212,142.969 227.594,142.969 230.047,140.516 230.671,140.516 236.311,134.876 236.311,125.193 238.881,122.624 238.881,111.081 238.1,110.3 U.14
BT_TX: CN.55 U.13 | length 87
  Bottom Layer w0.254: CN.55 186.69,108.037 200.292,121.639 224.773,121.639 226.314,120.098 226.314,115.062 232.276,109.1 U.13
GND: C1.2 C2.2 C5.2 Cin.2 Cinx.2 CN.8 CN.19 CN.20 CN.22 CN.47 CN.58 Cout.1 Css.2 J1.3 J2.1 Joystick.H3 Joystick.S1 Joystick.S2 Joystick.S3 Joystick.S4 Joystick.V3 LED1.3 LED1.4 LED2.3 LED2.4 LED3.3 LED3.4 LED4.3 LED4.4 Power.2 Power.3 Power.4 R9.2 R10.2 R11.2 R12.2 R13.2 R14.2 R15.2 R16.2 R20.3 R22.2 Rfbb.2 Rt.2 U1.4 U2.1 U2.8 U2.14 U3.2 U3.4 U4.2 U5.2 U6.2 U7.2 U7.3 U7.5 U7.6 U7.7 U8.2 U8.3 U9.2 U9.3 U.1 U.12 U.28 U.29 X2.3 | length 75.2
  Top Layer w0.254: Joystick.V3@96.505,113.015 Joystick.V3 ; Joystick.S1@98.786,122.237 Joystick.S1 ; Joystick.S2@98.856,108.902 Joystick.S2 ; Joystick.H3 Joystick.H3@109.235,105.395 ; Joystick.S3 Joystick.S3@114.574,108.902 ; Joystick.S4 Joystick.S4@114.519,122.237 ; U9.3@117.907,151.333 U9.3 ; C2.2 120.25,94.38 v1(120.25,93.25) ; v1(122.538,102.235) U3.4 ; v1(122.538,104.775) U3.2 ; R22.2 127,85.37 v1(127,84.5) ; v1(129.5,115.5) 129.5,114.34 C1.2 ; v1(138.75,81.75) 138.841,81.75 139.238,81.353 139.627,81.353 LED4.3 ; v1(138.765,155.384) 140.739,155.384 Power.4 ; U2.1@142.01,93.98 142.125,93.865 U2.1 ; v1(142.037,146.87) Power.2 ; v1(145.25,81.5) 145.525,81.5 145.737,81.288 145.947,81.288 LED3.3 ; Power.3 146.489,155.634 v1(149.015,155.634) ; LED2.3 152.362,81.184 152.243,81.303 151.947,81.303 v1(151.75,81.5) 151.978,81.5 152.362,81.884 LED2.4 ; v1(158.25,81.5) 158.525,81.5 158.768,81.257 159.043,81.257 LED1.3 ; X2.3 169.68,153.74 169.68,156.93 v1(169.75,157) ; U2.8@192.479,94.054 U2.8 ; U2.14 U2.14@207.825,94.054 ; R9.2 219.75,95.53 v1(219.75,94.766) ; J1.3@223.455,119.315 J1.3 ; v1(224.75,94.75) 224.79,94.79 R10.2 ; U8.2@227.077,153.417 U8.2 ; v1(229.75,94.75) 229.87,94.87 R11.2 ; R12.2 235,95.52 v1(235,94.75) ; v1(239.97,94.73) 240,94.76 R13.2
  Bottom Layer w0.15: U1.4 138.663,134.367 v1@138.663,132.537
  Bottom Layer w0.254: Cout.1 120.215,142.36 v1(121.205,142.36) ; v1(126.63,128.255) 127.53,128.255 Cinx.2 ; Rfbb.2 138.46,141 v1(139.5,141) ; v1@138.663,132.537 138.925,132.275 v1(138.925,132) ; Css.2 v1(140.462,127) ; v1(142.608,125.65) Cin.2@144.78,125.65 ; v1(145.37,134.105) 145.37,135.245 Rt.2 ; v1(162.598,120.5) 164.42,120.5 C5.2 ; v1(173.93,142.494) 173.93,141.03 CN.8 ; CN.47 v1(176.53,87.122) ; v1(189.23,78.486) CN.58 ; CN.20 v1(189.23,142.494) ; v1(189.23,146.05) CN.19 ; v1(191,106.75) 192.02,106.75 R14.2 ; CN.22 v1(191.77,142.494) ; U4.2 194.15,99.44 195.19,99.44 v1(195.25,99.5) ; v1(197.5,106.75) 198.37,106.75 R15.2 ; U5.2 200.505,99.315 201.685,99.315 v1(201.75,99.25) ; v1(203.75,106.75) 204.72,106.75 R16.2 ; U6.2 206.85,99.44 207.94,99.44 v1(208,99.5) ; U7.7 228.275,123.159 v1@228.953,122.481 ; U7.6 228.953,124.387 v1@228.953,122.481 ; v1(228.981,122.428) v1@228.981,122.453 ; U7.5 229.575,123.271 228.981,122.677 v1@228.981,122.453 ; U7.3 231.81,126.04 232.135,126.365 v1(232.41,126.365) ; U7.2 231.759,126.69 231.81,126.639 ; v1@240.8,105.057 v1(240.8,104.538) U.28 ; U.29 247,107.725 247.5,108.225 v1(247.5,108.5) ; v1(247.65,122.174) 247.713,122.237 250.237,122.237 U.1 ; U.12 v1(252.062,109.1) ; v1@228.953,122.481 v1@228.981,122.453
JOY_X: CN.35 Joystick.V2 | length 137.2
  Bottom Layer w0.254: Joystick.V2 100.33,115.57 105.156,120.396 105.156,135.636 118.618,149.098 207.674,149.098 209.55,147.222 CN.35
JOY_Y: CN.36 Joystick.H2 | length 145.8
  Bottom Layer w0.254: Joystick.H2 106.68,105.472 105.813,106.339 105.813,135.426 105.918,135.531 106.067,135.531 119.126,148.59 207.201,148.59 208.28,147.511 208.28,144.145 209.55,142.875 CN.36
LED1_G: CN.1 R1.1 | length 97.1
  Top Layer w0.254: R1.1 171.704,102.004 v1(171.704,103.886)
  Bottom Layer w0.254: CN.1 166.632,146.36 166.632,145.28 168.148,143.764 188.23,143.764 188.26,143.734 193.578,143.734 194.056,143.256 204.343,143.256 205.994,141.605 205.994,137.16 172.72,103.886 v1(171.704,103.886)
LED1_R: CN.34 R2.1 | length 60.3
  Top Layer w0.254: R2.1 167.005,101.805 v1(167.005,103.759)
  Bottom Layer w0.254: v1(167.005,103.759) 169.047,103.759 169.936,102.87 172.466,102.87 207.01,137.414 CN.34
LED2_G: CN.65 R3.1 | length 70.6
  Top Layer w0.254: R3.1 162.5,101.7 v1(162.5,99.75)
  Bottom Layer w0.254: v1(162.5,99.75) 158.742,95.992 152.796,95.992 151.257,94.453 151.257,93.507 161.609,83.155 182.699,83.155 183.077,83.533 198.533,83.533 199.32,84.32 199.32,85.592 CN.65
LED2_R: CN.67 R4.1 | length 74.8
  Top Layer w0.254: R4.1 157.5,101.7 v1@157.5,100
  Bottom Layer w0.254: v1(157.5,99.75) 157.411,99.661 157.411,98.911 155,96.5 150.764,96.5 148.717,94.453 148.717,91.862 150.438,90.141 157.932,82.647 182.909,82.647 183.287,83.025 200.525,83.025 201.82,84.32 201.82,85.552 CN.67
LED3_G: CN.54 R5.1 | length 64.5
  Top Layer w0.254: R5.1 152.5,101.7 v1(152.5,100)
  Bottom Layer w0.254: v1(152.5,100) 149.75,97.25 148.768,97.25 146,94.482 146,82.75 151.266,77.484 183.115,77.484 184.15,78.519 CN.54
LED3_R: CN.66 R6.1 | length 109
  Top Layer w0.254: R6.1 147.5,101.8 v1(147.5,103.5)
  Bottom Layer w0.254: v1(147.5,103.5) 147.5,105.5 147,106 135.25,106 133.75,104.5 133.75,95.25 142.734,86.266 142.734,78.298 145.072,75.96 197.71,75.96 199.25,77.5 199.25,79.87 CN.66
LED4_G: CN.68 R7.1 | length 105.9
  Top Layer w0.254: R7.1 142.75,101.8 v1(142.75,103.75)
  Bottom Layer w0.254: v1(142.75,103.75) 142.75,105.25 142.508,105.492 135.492,105.492 134.5,104.5 134.5,95.5 143.242,86.758 143.242,78.508 145.282,76.468 195.936,76.468 195.944,76.476 198.099,78.631 198.099,81.085 198.515,81.501 201.039,81.501 201.93,80.61 CN.68
LED4_R: CN.64 R8.1 | length 81.6
  Top Layer w0.254: R8.1 138,101.7 v1(138,99.75)
  Bottom Layer w0.254: v1(138,99.75) 138,92.75 143.75,87 143.75,78.718 145.484,76.984 145.492,76.976 195.726,76.976 196.85,78.1 CN.64
LIDAR_GPIO: CN.41 X2.4 | length 135.2
  Top Layer w0.254: v1(168.91,87.122) 171.196,89.408 206.8,89.408 209.55,92.158 209.55,143.405 205.127,147.828 178.452,147.828 X2.4
LIDAR_SADN: CN.43 X2.5 | length 131.1
  Top Layer w0.254: v1(171.45,87.122) 171.45,87.376 172.974,88.9 207.01,88.9 210.058,91.948 210.058,143.764 205.232,148.59 180.69,148.59 X2.5
LIDAR_SCL: CN.59 X2.6 | length 109.1
  Top Layer w0.254: X2.6 182.928,149.352 205.188,149.352 210.566,143.974 210.566,91.694 207.264,88.392 192.786,88.392 191.77,87.376 v1(191.77,87.122)
LIDAR_SDA: CN.71 X2.7 | length 91.9
  Top Layer w0.254: X2.7 185.42,149.86 205.399,149.86 210.479,144.78 210.566,144.78 211.074,144.272 211.074,91.44 v1(207.01,87.376)
NetC2_1: C2.1 R20.2 U3.3 | length 24.4
  Top Layer w0.254: R20.2 117,93.24 119.199,95.439 119.258,95.439 119.927,96.108 C2.1 120.357,96.108 120.8,96.551 120.8,101.934 122.371,103.505 U3.3
NetC3_1: C3.1 C4.1 U3.5 | length 11.8
  Top Layer w0.254: C3.1 124.803,96.52 127.745,99.463 128.905,99.463 ; U3.5 129.45,100.24 128.905,99.695 128.905,99.463 ; C4.1@129.54,96.6 129.45,96.69 129.45,98.425 128.905,98.97 128.905,99.463
NetC3_2: C3.2 R22.1 | length 7.4
  Top Layer w0.254: C3.2 124.46,89.61 126.76,87.31 R22.1
NetC4_2: C4.2 J2.2 R21.1 | length 26.4
  Top Layer w0.254: R21.1 127.2,80.325 129.54,82.665 129.54,87.63 ; C4.2@129.54,93.9 129.54,87.63 ; J2.2 136.6,82.492 131.462,87.63 129.54,87.63
NetCboot_1: Cboot.1 U1.6 | length 9.1
  Bottom Layer w0.15: Cboot.1 128.65,135.875 129.635,134.89 U1.6
NetCboot_2: Cboot.2 L.1 U1.5 | length 19
  Bottom Layer w0.15: Cboot.2 128.54,134.39 U1.5
  Bottom Layer w0.254: L.1 119.68,131.42 122.535,134.275 Cboot.2
NetCss_1: Css.1 U1.7 | length 16.5
  Top Layer w0.254: v1(134.075,126.775) 134.125,126.825 134.125,136.25 v1(134.175,136.3)
  Bottom Layer w0.15: 135.085,135.39 U1.7
  Bottom Layer w0.254: v1(134.075,126.775) 137.305,126.775 Css.1 ; v1(134.175,136.3) 135.085,135.39
NetJ2_3: J2.3 R21.2 | length 6.6
  Top Layer w0.254: R21.2 127.2,78.425 128.775,80 J2.3
NetLED1_1: LED1.1 R1.2 | length 24.6
  Top Layer w0.254: LED1.1 160.489,81.257 160.878,81.257 169.55,89.929 R1.2
NetLED1_2: LED1.2 R2.2 | length 21.9
  Top Layer w0.254: LED1.2 160.566,81.884 165.05,86.368 R2.2
NetLED2_1: LED2.1 R3.2 | length 23.6
  Top Layer w0.254: LED2.1 153.885,81.257 154.274,81.257 160.55,87.533 R3.2
NetLED2_2: LED2.2 R4.2 | length 21.1
  Top Layer w0.254: LED2.2 153.962,81.884 156.083,84.005 156.083,97.075 155.55,97.608 R4.2
NetLED3_1: LED3.1 R5.2 | length 22.5
  Top Layer w0.254: LED3.1 147.393,81.288 147.782,81.288 151.032,84.538 151.032,96.129 151.016,96.145 150.55,96.611 R5.2
NetLED3_2: LED3.2 R6.2 | length 20.7
  Top Layer w0.254: R6.2 145.55,94.826 146.177,94.199 146.177,82.908 147.17,81.915 LED3.2
NetLED4_1: LED4.1 R7.2 | length 22.7
  Top Layer w0.254: R7.2 140.8,97.869 139.235,96.305 139.235,90.211 141.731,87.716 141.731,81.622 141.462,81.353 141.073,81.353 LED4.1
NetLED4_2: LED4.2 R8.2 | length 21.9
  Top Layer w0.254: R8.2 136.05,86.78 140.85,81.98 LED4.2
NetLED5_1: LED5.1 R18.1 | length 8.2
  Top Layer w0.254: R18.1 219.8,137.389 223.038,140.627 223.427,140.627 LED5.1
NetLED5_2: LED5.2 R17.1 | length 7.4
  Top Layer w0.254: LED5.2 223.5,138.45 227.5,134.45 R17.1
NetLED5_3: LED5.3 U.31 | length 46.2
  Top Layer w0.254: LED5.3 229.2,140.7 v1(230.25,141.75)
  Bottom Layer w0.254: v1(230.25,141.75) 236.819,135.181 236.819,125.542 242.1,120.261 U.31
NetLED5_4: LED5.4 U.21 | length 30.1
  Top Layer w0.254: LED5.4 229.475,140 229.975,139.5 v1(230.25,139.5)
  Bottom Layer w0.254: v1(230.25,139.5) 230.444,139.306 230.944,139.306 235.75,134.5 235.75,119.85 236.9,118.7 U.21
NetR23_2: R23.2 U8.1 | length 10.7
  Bottom Layer w0.254: R23.2 219.928,154.839 228.701,154.839 U8.1
NetR25_2: R25.2 U9.1 | length 5.6
  Bottom Layer w0.254: U9.1 121.86,152.72 R25.2
NetRfbb_1: Rfbb.1 Rfbt.2 U1.8 | length 13
  Bottom Layer w0.15: U1.8 Rfbb.1@137.16,140.615
  Bottom Layer w0.254: Rfbt.2 Rfbb.1 136.83,140.945 Rfbb.1@137.16,140.615
NetRt_1: Rt.1 U1.1 | length 7.3
  Bottom Layer w0.15: U1.1 139.925,137.175 Rt.1
NetU2_10: U2.10 U4.3 | length 8.8
  Bottom Layer w0.254: U4.3 192.34,100.33 192.513,100.157 192.513,99.07 197.476,94.107 U2.10
NetU2_11: U2.11 U5.3 | length 7
  Bottom Layer w0.254: U5.3 198.34,95.919 U2.11
NetU2_12: U2.12 U6.3 | length 7.3
  Bottom Layer w0.254: U2.12 204.167,95.582 204.167,100.157 204.34,100.33 U6.3
PHOTO_1: CN.37 R24.2 U8.4 | length 26.9
  Bottom Layer w0.254: CN.37 212.09,152.28 214.43,154.62 R24.2 214.83,154.62 219.749,149.702 228.701,149.702 U8.4
PHOTO_2: CN.28 R26.2 U9.4 | length 93.4
  Top Layer w0.254: U9.4 127.762,144.018 167.176,144.018 167.211,144.054 169.426,144.054 169.462,144.018 197.887,144.018 199.39,142.515 v1(199.39,142.24)
  Bottom Layer w0.254: U9.4 129.02,151.13 130.61,152.72 R26.2
RX_debug: CN.44 J1.2 | length 84.6
  Bottom Layer w0.254: CN.44 171.45,81.45 171.631,81.631 191.284,81.631 191.662,82.009 211.314,82.009 214,84.695 214,112.75 218.09,116.84 J1.2
SCREEN_A0: CN.39 U2.5 | length 17.4
  Bottom Layer w0.254: U2.5 159.122,87.258 162.96,87.258 164.556,85.662 CN.39@166.37,85.662
SCREEN_BCKL_B: CN.42 R16.1 U6.1 | length 74.2
  Bottom Layer w0.254: CN.42 168.91,81.99 169.059,82.139 189.892,82.139 190.27,82.517 211.104,82.517 213.492,84.905 213.492,97.758 209.97,101.28 U6.1 206.69,101.38 R16.1
SCREEN_BCKL_G: CN.2 R15.1 U5.1 | length 75.1
  Top Layer w0.254: v1(166.37,142.494) 167.386,143.51 196.088,143.51 201.676,137.922 201.676,107.337 201.168,106.829 v1(201.168,106.68)
  Bottom Layer w0.254: R15.1@200.34,106.88 R15.1 200.34,101.38 U5.1
SCREEN_BCKL_R: CN.3 R14.1 U4.1 | length 82.9
  Top Layer w0.254: v1(168.91,145.288) 169.672,144.526 198.541,144.526 202.184,140.883 202.184,106.259 201.589,105.664 196.088,105.664 v1(195.072,106.68)
  Bottom Layer w0.254: R14.1 193.99,101.38 U4.1
SCREEN_CHIPSELECT: CN.61 U2.7 | length 44.1
  Bottom Layer w0.254: U2.7 162.96,88.5 167,88.5 167.769,87.731 167.769,84.644 168.119,84.294 168.75,83.663 182.488,83.663 182.996,84.171 193.421,84.171 193.927,84.677 193.927,85.279 CN.61
SCREEN_MOSI: CN.50 U2.3 | length 44.3
  Bottom Layer w0.254: U2.3 147.32,84.493 153.313,78.5 177.56,78.5 CN.50
SCREEN_RES: CN.52 U2.6 | length 47.2
  Top Layer w0.254: U2.6 154.94,86.44 150.5,82 150.5,81 153.25,78.25 180.843,78.25 180.899,78.306 181.416,78.306 v1(181.61,78.5)
SCREEN_SCL: CN.30 U2.2 | length 92.6
  Bottom Layer w0.254: U2.2 148.85,98.05 148.85,102.368 152.908,106.426 174.244,106.426 183.388,115.57 183.388,136.652 185.166,138.43 201.212,138.43 201.93,139.148 CN.30
TX_debug: CN.72 J1.1 | length 45.1
  Bottom Layer w0.254: CN.72 207.01,80.61 207.901,81.501 211.525,81.501 214.508,84.484 214.508,108.508 220.3,114.3 J1.1
pads on no net: BT_Bas.3 BT_Bas.4 BT_Droite.3 BT_Droite.4 BT_Entrer.3 BT_Entrer.4 BT_Gauche.3 BT_Gauche.4 BT_Haut.3 BT_Haut.4 CN.4 CN.5 CN.6 CN.7 CN.9 CN.10 CN.11 CN.12 CN.13 CN.14 CN.15 CN.16 CN.23 CN.24 CN.25 CN.26 CN.27 CN.29 CN.31 CN.33 CN.40 CN.45 CN.46 CN.48 CN.49 CN.69 CN.70 CN.73 CN.74 CN.75 CN.76 J2.MH1 Joystick.B1A Joystick.B1B Joystick.B2A Joystick.B2B Power. U1.2 U2.9 U3.1 U3.7 U3.8 U7.1 U7.4 U7.9 U7.11 U7.13 U7.16 U7.17 U.2 U.3 U.4 U.6 U.7 U.8 U.9 U.10 U.15 U.16 U.17 U.18 U.19 U.20 U.22 U.23 U.24 U.30 U.32 U.33 U.34 U.35 U.S1 U.S2 U.S3 U.S4 X2.8 X2.9

## Polygon pours and split planes (outlines as drawn)
+3V3 on +3V3 (split plane): 333 vertices, not listed, extent 86.869,74.55 260.851,158.532
GND on GND (split plane): 333 vertices, not listed, extent 86.869,74.55 260.851,158.532

## Silkscreen, mask and mechanical layers (free items; w line width, h text height)
Mechanical 1:
  circle w0.006: c86.25,74 r0.003
  circle w0.006: c86.25,74 r0.003
  lines w0.013: 86.25,99 ccw(c91.25,99) 91.25,94 101.25,94 cw(c101.25,89) 106.25,89 106.25,79 ccw(c111.25,79) 111.25,74 236.25,74 ccw(c236.25,79) 241.25,79 241.25,89 cw(c246.25,89) 246.25,94 256.25,94 ccw(c256.25,99) 261.25,99 261.25,134 ccw(c256.25,134) 256.25,139 246.25,139 cw(c246.25,144) 241.25,144 241.25,154 ccw(c236.25,154) 236.25,159 111.25,159 ccw(c111.25,154) 106.25,154 106.25,144 cw(c101.25,144) 101.25,139 91.25,139 ccw(c91.25,134) 86.25,134 86.25,99 ; 86.36,99.041 ccw(c91.36,99.041) 91.36,94.041 101.36,94.041 cw(c101.36,89.041) 106.36,89.041 106.36,79.041 ccw(c111.36,79.041) 111.36,74.041 236.36,74.041 ccw(c236.36,79.041) 241.36,79.041 241.36,89.041 cw(c246.36,89.041) 246.36,94.041 261.36,94.041 261.36,134.041 ccw(c256.36,134.041) 256.36,139.041 246.36,139.041 cw(c246.36,144.041) 241.36,144.041 241.36,154.041 ccw(c236.36,154.041) 236.36,159.041 111.36,159.041 ccw(c111.36,154.041) 106.36,154.041 106.36,144.041 cw(c101.36,144.041) 101.36,139.041 91.36,139.041 ccw(c91.36,134.041) 86.36,134.041 86.36,99.041
Mechanical 3:
  circle w0.013: c236.75,149.5 r1.5
  circle w0.013: c110.75,149.5 r1.5
  circle w0.013: c110.75,83.5 r1.5
  circle w0.013: c236.75,83.5 r1.5
  circle w0.006: c86.25,74 r0.003
  lines w0.013: 86.25,99 86.25,134 ; 111.25,159 236.25,159 ; 261.25,99 261.25,134

## Text inside footprints (layer, text, board x,y; h text height)
CN: Bottom Overlay "39" at 164.309,85.027 h1.97; Bottom Overlay "40" at 164.309,79.375 h1.97; Bottom Overlay "1" at 164.309,145.987 h1.97; Bottom Overlay "2" at 164.309,140.335 h1.97; Bottom Overlay "STM32NUCLEO" at 156.918,140.24 h5 r90; Mechanical 16 "39" at 164.309,85.027 h1.97; Mechanical 16 "40" at 164.309,79.375 h1.97; Mechanical 16 "2" at 164.309,140.335 h1.97; Mechanical 16 "1" at 164.309,145.987 h1.97
U2: Top Overlay "128*64 DOTS" at 135.001,132.461 h5; Top Overlay "Viewing direction" at 134.874,109.728 h3